# Altium PCB TFT_Adapter_Board_拼版.PcbDoc (part 3 of 9)
Units mm, origin at the board's own origin, x right, y up, seen from the top; angles counter-clockwise.
Board outline 137 x 166.56 mm, 2 copper layers (Top Layer, Bottom Layer); 80 components, 32 nets, 2615 pads, 0 vias.
Unrouted connection lines stored in the file: 1248.
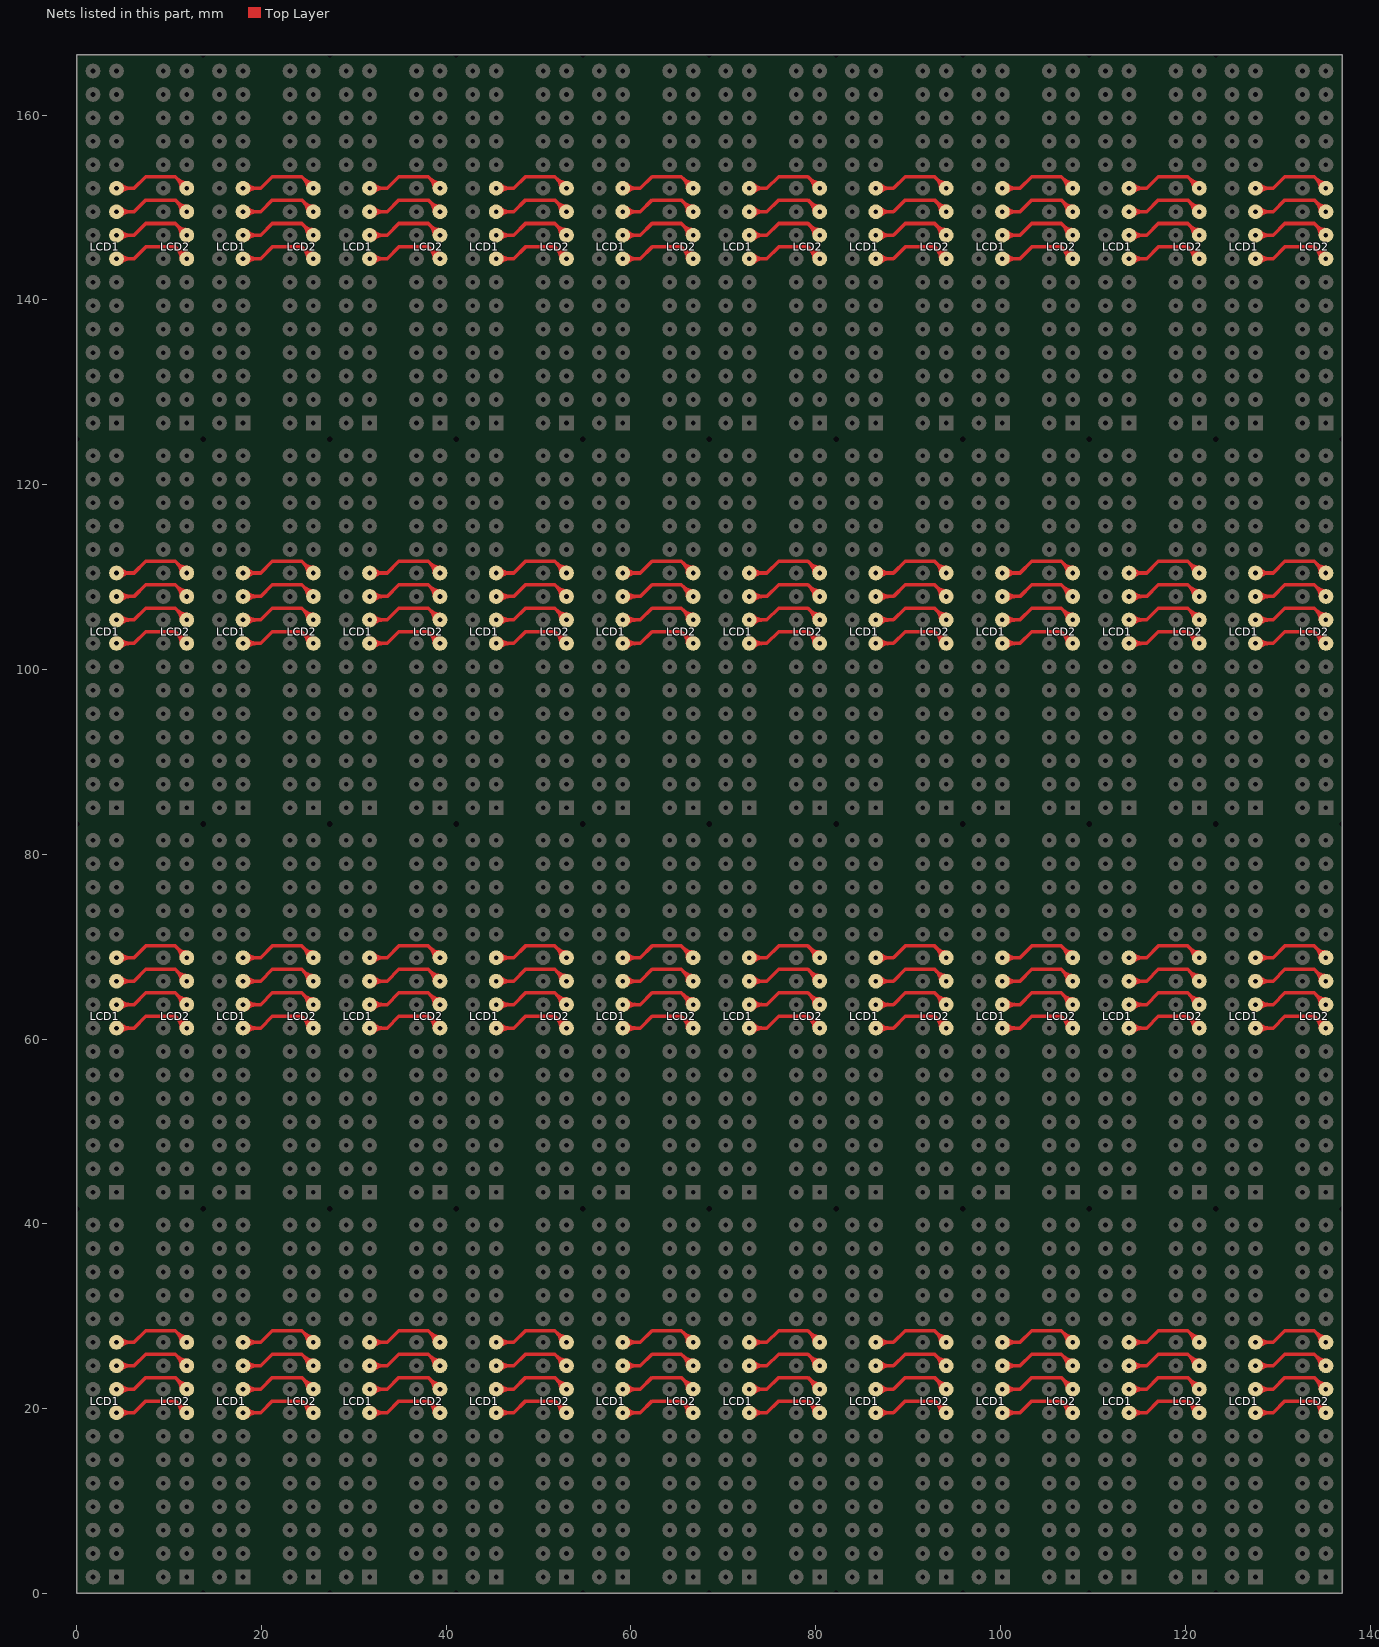
[diagram p3: the nets of this part, all layers, seen from the top]

## Nets (pads, with @x,y where several pads share a name; then routed paths per layer and width w, separated by ;. In a path a pad name is that pad's centre, name@x,y a point inside that pad or via, vN(x,y) a via of type N, cw(c..) or ccw(c..) an arc to the next point about the centre after c; other vN are vias at no path point) (continued)
NetLCD1_8: LCD1.8 LCD2.8 | length 531.8
  Top Layer w0.381: LCD1.8@4.31,19.55 6.215,19.55 7.485,20.82 10.66,20.82 LCD2.8@11.93,19.55 ; LCD1.8@4.31,61.19 6.215,61.19 7.485,62.46 10.66,62.46 LCD2.8@11.93,61.19 ; LCD1.8@4.31,102.83 6.215,102.83 7.485,104.1 10.66,104.1 LCD2.8@11.93,102.83 ; LCD1.8@4.31,144.47 6.215,144.47 7.485,145.74 10.66,145.74 LCD2.8@11.93,144.47 ; LCD1.8@4.741,19.119 cw(c5.781,18.079) 5.781,19.55 cw(c5.781,21.021) LCD1.8@4.741,19.981 ; LCD1.8@4.741,60.759 cw(c5.781,59.719) 5.781,61.19 cw(c5.781,62.661) LCD1.8@4.741,61.621 ; LCD1.8@4.741,102.399 cw(c5.781,101.359) 5.781,102.83 cw(c5.781,104.301) LCD1.8@4.741,103.261 ; LCD1.8@4.741,144.039 cw(c5.781,142.999) 5.781,144.47 cw(c5.781,145.941) LCD1.8@4.741,144.901 ; LCD2.8@11.321,19.55 ccw(c9.849,19.55) 10.89,20.59 ccw(c11.93,21.631) LCD2.8@11.93,20.159 ; LCD2.8@11.321,61.19 ccw(c9.849,61.19) 10.89,62.23 ccw(c11.93,63.271) LCD2.8@11.93,61.799 ; LCD2.8@11.321,102.83 ccw(c9.849,102.83) 10.89,103.87 ccw(c11.93,104.911) LCD2.8@11.93,103.439 ; LCD2.8@11.321,144.47 ccw(c9.849,144.47) 10.89,145.51 ccw(c11.93,146.551) LCD2.8@11.93,145.079 ; LCD1.8@18.01,19.55 19.915,19.55 21.185,20.82 24.36,20.82 LCD2.8@25.63,19.55 ; LCD1.8@18.01,61.19 19.915,61.19 21.185,62.46 24.36,62.46 LCD2.8@25.63,61.19 ; LCD1.8@18.01,102.83 19.915,102.83 21.185,104.1 24.36,104.1 LCD2.8@25.63,102.83 ; LCD1.8@18.01,144.47 19.915,144.47 21.185,145.74 24.36,145.74 LCD2.8@25.63,144.47 ; LCD1.8@18.441,19.119 cw(c19.481,18.079) 19.481,19.55 cw(c19.481,21.021) LCD1.8@18.441,19.981 ; LCD1.8@18.441,60.759 cw(c19.481,59.719) 19.481,61.19 cw(c19.481,62.661) LCD1.8@18.441,61.621 ; LCD1.8@18.441,102.399 cw(c19.481,101.359) 19.481,102.83 cw(c19.481,104.301) LCD1.8@18.441,103.261 ; LCD1.8@18.441,144.039 cw(c19.481,142.999) 19.481,144.47 cw(c19.481,145.941) LCD1.8@18.441,144.901 ; LCD2.8@25.02,19.55 ccw(c23.549,19.55) 24.59,20.59 ccw(c25.63,21.631) LCD2.8@25.63,20.159 ; LCD2.8@25.02,61.19 ccw(c23.549,61.19) 24.59,62.23 ccw(c25.63,63.271) LCD2.8@25.63,61.799 ; LCD2.8@25.02,102.83 ccw(c23.549,102.83) 24.59,103.87 ccw(c25.63,104.911) LCD2.8@25.63,103.439 ; LCD2.8@25.02,144.47 ccw(c23.549,144.47) 24.59,145.51 ccw(c25.63,146.551) LCD2.8@25.63,145.079 ; LCD1.8@31.71,19.55 33.615,19.55 34.885,20.82 38.06,20.82 LCD2.8@39.33,19.55 ; LCD1.8@31.71,61.19 33.615,61.19 34.885,62.46 38.06,62.46 LCD2.8@39.33,61.19 ; LCD1.8@31.71,102.83 33.615,102.83 34.885,104.1 38.06,104.1 LCD2.8@39.33,102.83 ; LCD1.8@31.71,144.47 33.615,144.47 34.885,145.74 38.06,145.74 LCD2.8@39.33,144.47 ; LCD1.8@32.141,19.119 cw(c33.181,18.079) 33.181,19.55 cw(c33.181,21.021) LCD1.8@32.141,19.981 ; LCD1.8@32.141,60.759 cw(c33.181,59.719) 33.181,61.19 cw(c33.181,62.661) LCD1.8@32.141,61.621 ; LCD1.8@32.141,102.399 cw(c33.181,101.359) 33.181,102.83 cw(c33.181,104.301) LCD1.8@32.141,103.261 ; LCD1.8@32.141,144.039 cw(c33.181,142.999) 33.181,144.47 cw(c33.181,145.941) LCD1.8@32.141,144.901 ; LCD2.8@38.72,19.55 ccw(c37.249,19.55) 38.29,20.59 ccw(c39.33,21.631) LCD2.8@39.33,20.159 ; LCD2.8@38.72,61.19 ccw(c37.249,61.19) 38.29,62.23 ccw(c39.33,63.271) LCD2.8@39.33,61.799 ; LCD2.8@38.72,102.83 ccw(c37.249,102.83) 38.29,103.87 ccw(c39.33,104.911) LCD2.8@39.33,103.439 ; LCD2.8@38.72,144.47 ccw(c37.249,144.47) 38.29,145.51 ccw(c39.33,146.551) LCD2.8@39.33,145.079 ; LCD1.8@45.41,19.55 47.315,19.55 48.585,20.82 51.76,20.82 LCD2.8@53.03,19.55 ; LCD1.8@45.41,61.19 47.315,61.19 48.585,62.46 51.76,62.46 LCD2.8@53.03,61.19 ; LCD1.8@45.41,102.83 47.315,102.83 48.585,104.1 51.76,104.1 LCD2.8@53.03,102.83 ; LCD1.8@45.41,144.47 47.315,144.47 48.585,145.74 51.76,145.74 LCD2.8@53.03,144.47 ; LCD1.8@45.841,19.119 cw(c46.881,18.079) 46.881,19.55 cw(c46.881,21.021) LCD1.8@45.841,19.981 ; LCD1.8@45.841,60.759 cw(c46.881,59.719) 46.881,61.19 cw(c46.881,62.661) LCD1.8@45.841,61.621 ; LCD1.8@45.841,102.399 cw(c46.881,101.359) 46.881,102.83 cw(c46.881,104.301) LCD1.8@45.841,103.261 ; LCD1.8@45.841,144.039 cw(c46.881,142.999) 46.881,144.47 cw(c46.881,145.941) LCD1.8@45.841,144.901 ; LCD2.8@52.42,19.55 ccw(c50.949,19.55) 51.99,20.59 ccw(c53.03,21.631) LCD2.8@53.03,20.159 ; LCD2.8@52.42,61.19 ccw(c50.949,61.19) 51.99,62.23 ccw(c53.03,63.271) LCD2.8@53.03,61.799 ; LCD2.8@52.42,102.83 ccw(c50.949,102.83) 51.99,103.87 ccw(c53.03,104.911) LCD2.8@53.03,103.439 ; LCD2.8@52.42,144.47 ccw(c50.949,144.47) 51.99,145.51 ccw(c53.03,146.551) LCD2.8@53.03,145.079 ; LCD1.8@59.11,19.55 61.015,19.55 62.285,20.82 65.46,20.82 LCD2.8@66.73,19.55 ; LCD1.8@59.11,61.19 61.015,61.19 62.285,62.46 65.46,62.46 LCD2.8@66.73,61.19 ; LCD1.8@59.11,102.83 61.015,102.83 62.285,104.1 65.46,104.1 LCD2.8@66.73,102.83 ; LCD1.8@59.11,144.47 61.015,144.47 62.285,145.74 65.46,145.74 LCD2.8@66.73,144.47 ; LCD1.8@59.541,19.119 cw(c60.581,18.079) 60.581,19.55 cw(c60.581,21.021) LCD1.8@59.541,19.981 ; LCD1.8@59.541,60.759 cw(c60.581,59.719) 60.581,61.19 cw(c60.581,62.661) LCD1.8@59.541,61.621 ; LCD1.8@59.541,102.399 cw(c60.581,101.359) 60.581,102.83 cw(c60.581,104.301) LCD1.8@59.541,103.261 ; LCD1.8@59.541,144.039 cw(c60.581,142.999) 60.581,144.47 cw(c60.581,145.941) LCD1.8@59.541,144.901 ; LCD2.8@66.12,19.55 ccw(c64.649,19.55) 65.69,20.59 ccw(c66.73,21.631) LCD2.8@66.73,20.159 ; LCD2.8@66.12,61.19 ccw(c64.649,61.19) 65.69,62.23 ccw(c66.73,63.271) LCD2.8@66.73,61.799 ; LCD2.8@66.12,102.83 ccw(c64.649,102.83) 65.69,103.87 ccw(c66.73,104.911) LCD2.8@66.73,103.439 ; LCD2.8@66.12,144.47 ccw(c64.649,144.47) 65.69,145.51 ccw(c66.73,146.551) LCD2.8@66.73,145.079 ; LCD1.8@72.81,19.55 74.715,19.55 75.985,20.82 79.16,20.82 LCD2.8@80.43,19.55 ; LCD1.8@72.81,61.19 74.715,61.19 75.985,62.46 79.16,62.46 LCD2.8@80.43,61.19 ; LCD1.8@72.81,102.83 74.715,102.83 75.985,104.1 79.16,104.1 LCD2.8@80.43,102.83 ; LCD1.8@72.81,144.47 74.715,144.47 75.985,145.74 79.16,145.74 LCD2.8@80.43,144.47 ; LCD1.8@73.241,19.119 cw(c74.281,18.079) 74.281,19.55 cw(c74.281,21.021) LCD1.8@73.241,19.981 ; LCD1.8@73.241,60.759 cw(c74.281,59.719) 74.281,61.19 cw(c74.281,62.661) LCD1.8@73.241,61.621 ; LCD1.8@73.241,102.399 cw(c74.281,101.359) 74.281,102.83 cw(c74.281,104.301) LCD1.8@73.241,103.261 ; LCD1.8@73.241,144.039 cw(c74.281,142.999) 74.281,144.47 cw(c74.281,145.941) LCD1.8@73.241,144.901 ; LCD2.8@79.82,19.55 ccw(c78.349,19.55) 79.39,20.59 ccw(c80.43,21.631) LCD2.8@80.43,20.159 ; LCD2.8@79.82,61.19 ccw(c78.349,61.19) 79.39,62.23 ccw(c80.43,63.271) LCD2.8@80.43,61.799 ; LCD2.8@79.82,102.83 ccw(c78.349,102.83) 79.39,103.87 ccw(c80.43,104.911) LCD2.8@80.43,103.439 ; LCD2.8@79.82,144.47 ccw(c78.349,144.47) 79.39,145.51 ccw(c80.43,146.551) LCD2.8@80.43,145.079 ; LCD1.8@86.51,19.55 88.415,19.55 89.685,20.82 92.86,20.82 LCD2.8@94.13,19.55 ; LCD1.8@86.51,61.19 88.415,61.19 89.685,62.46 92.86,62.46 LCD2.8@94.13,61.19 ; LCD1.8@86.51,102.83 88.415,102.83 89.685,104.1 92.86,104.1 LCD2.8@94.13,102.83 ; LCD1.8@86.51,144.47 88.415,144.47 89.685,145.74 92.86,145.74 LCD2.8@94.13,144.47 ; LCD1.8@86.941,19.119 cw(c87.981,18.079) 87.981,19.55 cw(c87.981,21.021) LCD1.8@86.941,19.981 ; LCD1.8@86.941,60.759 cw(c87.981,59.719) 87.981,61.19 cw(c87.981,62.661) LCD1.8@86.941,61.621 ; LCD1.8@86.941,102.399 cw(c87.981,101.359) 87.981,102.83 cw(c87.981,104.301) LCD1.8@86.941,103.261 ; LCD1.8@86.941,144.039 cw(c87.981,142.999) 87.981,144.47 cw(c87.981,145.941) LCD1.8@86.941,144.901 ; LCD2.8@93.52,19.55 ccw(c92.049,19.55) 93.09,20.59 ccw(c94.13,21.631) LCD2.8@94.13,20.159 ; LCD2.8@93.52,61.19 ccw(c92.049,61.19) 93.09,62.23 ccw(c94.13,63.271) LCD2.8@94.13,61.799 ; LCD2.8@93.52,102.83 ccw(c92.049,102.83) 93.09,103.87 ccw(c94.13,104.911) LCD2.8@94.13,103.439 ; LCD2.8@93.52,144.47 ccw(c92.049,144.47) 93.09,145.51 ccw(c94.13,146.551) LCD2.8@94.13,145.079 ; LCD1.8@100.21,19.55 102.115,19.55 103.385,20.82 106.56,20.82 LCD2.8@107.83,19.55 ; LCD1.8@100.21,61.19 102.115,61.19 103.385,62.46 106.56,62.46 LCD2.8@107.83,61.19 ; LCD1.8@100.21,102.83 102.115,102.83 103.385,104.1 106.56,104.1 LCD2.8@107.83,102.83 ; LCD1.8@100.21,144.47 102.115,144.47 103.385,145.74 106.56,145.74 LCD2.8@107.83,144.47 ; LCD1.8@100.641,19.119 cw(c101.681,18.079) 101.681,19.55 cw(c101.681,21.021) LCD1.8@100.641,19.981 ; LCD1.8@100.641,60.759 cw(c101.681,59.719) 101.681,61.19 cw(c101.681,62.661) LCD1.8@100.641,61.621 ; LCD1.8@100.641,102.399 cw(c101.681,101.359) 101.681,102.83 cw(c101.681,104.301) LCD1.8@100.641,103.261 ; LCD1.8@100.641,144.039 cw(c101.681,142.999) 101.681,144.47 cw(c101.681,145.941) LCD1.8@100.641,144.901 ; LCD2.8@107.22,19.55 ccw(c105.749,19.55) 106.79,20.59 ccw(c107.83,21.631) LCD2.8@107.83,20.159 ; LCD2.8@107.22,61.19 ccw(c105.749,61.19) 106.79,62.23 ccw(c107.83,63.271) LCD2.8@107.83,61.799 ; LCD2.8@107.22,102.83 ccw(c105.749,102.83) 106.79,103.87 ccw(c107.83,104.911) LCD2.8@107.83,103.439 ; LCD2.8@107.22,144.47 ccw(c105.749,144.47) 106.79,145.51 ccw(c107.83,146.551) LCD2.8@107.83,145.079 ; LCD1.8@113.91,19.55 115.815,19.55 117.085,20.82 120.26,20.82 LCD2.8@121.53,19.55 ; LCD1.8@113.91,61.19 115.815,61.19 117.085,62.46 120.26,62.46 LCD2.8@121.53,61.19 ; LCD1.8@113.91,102.83 115.815,102.83 117.085,104.1 120.26,104.1 LCD2.8@121.53,102.83 ; LCD1.8@113.91,144.47 115.815,144.47 117.085,145.74 120.26,145.74 LCD2.8@121.53,144.47 ; LCD1.8@114.341,19.119 cw(c115.381,18.079) 115.381,19.55 cw(c115.381,21.021) LCD1.8@114.341,19.981 ; LCD1.8@114.341,60.759 cw(c115.381,59.719) 115.381,61.19 cw(c115.381,62.661) LCD1.8@114.341,61.621 ; LCD1.8@114.341,102.399 cw(c115.381,101.359) 115.381,102.83 cw(c115.381,104.301) LCD1.8@114.341,103.261 ; LCD1.8@114.341,144.039 cw(c115.381,142.999) 115.381,144.47 cw(c115.381,145.941) LCD1.8@114.341,144.901 ; LCD2.8@120.92,19.55 ccw(c119.449,19.55) 120.49,20.59 ccw(c121.53,21.631) LCD2.8@121.53,20.159 ; LCD2.8@120.92,61.19 ccw(c119.449,61.19) 120.49,62.23 ccw(c121.53,63.271) LCD2.8@121.53,61.799 ; LCD2.8@120.92,102.83 ccw(c119.449,102.83) 120.49,103.87 ccw(c121.53,104.911) LCD2.8@121.53,103.439 ; LCD2.8@120.92,144.47 ccw(c119.449,144.47) 120.49,145.51 ccw(c121.53,146.551) LCD2.8@121.53,145.079 ; LCD1.8@127.61,19.55 129.515,19.55 130.785,20.82 133.96,20.82 LCD2.8@135.23,19.55 ; LCD1.8@127.61,61.19 129.515,61.19 130.785,62.46 133.96,62.46 LCD2.8@135.23,61.19 ; LCD1.8@127.61,102.83 129.515,102.83 130.785,104.1 133.96,104.1 LCD2.8@135.23,102.83 ; LCD1.8@127.61,144.47 129.515,144.47 130.785,145.74 133.96,145.74 LCD2.8@135.23,144.47 ; LCD1.8@128.041,19.119 cw(c129.081,18.079) 129.081,19.55 cw(c129.081,21.021) LCD1.8@128.041,19.981 ; LCD1.8@128.041,60.759 cw(c129.081,59.719) 129.081,61.19 cw(c129.081,62.661) LCD1.8@128.041,61.621 ; LCD1.8@128.041,102.399 cw(c129.081,101.359) 129.081,102.83 cw(c129.081,104.301) LCD1.8@128.041,103.261 ; LCD1.8@128.041,144.039 cw(c129.081,142.999) 129.081,144.47 cw(c129.081,145.941) LCD1.8@128.041,144.901 ; LCD2.8@134.62,19.55 ccw(c133.149,19.55) 134.19,20.59 ccw(c135.23,21.631) LCD2.8@135.23,20.159 ; LCD2.8@134.62,61.19 ccw(c133.149,61.19) 134.19,62.23 ccw(c135.23,63.271) LCD2.8@135.23,61.799 ; LCD2.8@134.62,102.83 ccw(c133.149,102.83) 134.19,103.87 ccw(c135.23,104.911) LCD2.8@135.23,103.439 ; LCD2.8@134.62,144.47 ccw(c133.149,144.47) 134.19,145.51 ccw(c135.23,146.551) LCD2.8@135.23,145.079
NetLCD1_9: LCD1.9 LCD2.9 | length 531.8
  Top Layer w0.381: LCD1.9@4.31,22.09 6.215,22.09 7.485,23.36 10.66,23.36 LCD2.9@11.93,22.09 ; LCD1.9@4.31,63.73 6.215,63.73 7.485,65 10.66,65 LCD2.9@11.93,63.73 ; LCD1.9@4.31,105.37 6.215,105.37 7.485,106.64 10.66,106.64 LCD2.9@11.93,105.37 ; LCD1.9@4.31,147.01 6.215,147.01 7.485,148.28 10.66,148.28 LCD2.9@11.93,147.01 ; LCD1.9@4.741,21.659 cw(c5.781,20.619) 5.781,22.09 cw(c5.781,23.561) LCD1.9@4.741,22.521 ; LCD1.9@4.741,63.299 cw(c5.781,62.259) 5.781,63.73 cw(c5.781,65.201) LCD1.9@4.741,64.161 ; LCD1.9@4.741,104.939 cw(c5.781,103.899) 5.781,105.37 cw(c5.781,106.841) LCD1.9@4.741,105.801 ; LCD1.9@4.741,146.579 cw(c5.781,145.539) 5.781,147.01 cw(c5.781,148.481) LCD1.9@4.741,147.441 ; LCD2.9@11.321,22.09 ccw(c9.849,22.09) 10.89,23.13 ccw(c11.93,24.171) LCD2.9@11.93,22.699 ; LCD2.9@11.321,63.73 ccw(c9.849,63.73) 10.89,64.77 ccw(c11.93,65.811) LCD2.9@11.93,64.339 ; LCD2.9@11.321,105.37 ccw(c9.849,105.37) 10.89,106.41 ccw(c11.93,107.451) LCD2.9@11.93,105.979 ; LCD2.9@11.321,147.01 ccw(c9.849,147.01) 10.89,148.05 ccw(c11.93,149.091) LCD2.9@11.93,147.619 ; LCD1.9@18.01,22.09 19.915,22.09 21.185,23.36 24.36,23.36 LCD2.9@25.63,22.09 ; LCD1.9@18.01,63.73 19.915,63.73 21.185,65 24.36,65 LCD2.9@25.63,63.73 ; LCD1.9@18.01,105.37 19.915,105.37 21.185,106.64 24.36,106.64 LCD2.9@25.63,105.37 ; LCD1.9@18.01,147.01 19.915,147.01 21.185,148.28 24.36,148.28 LCD2.9@25.63,147.01 ; LCD1.9@18.441,21.659 cw(c19.481,20.619) 19.481,22.09 cw(c19.481,23.561) LCD1.9@18.441,22.521 ; LCD1.9@18.441,63.299 cw(c19.481,62.259) 19.481,63.73 cw(c19.481,65.201) LCD1.9@18.441,64.161 ; LCD1.9@18.441,104.939 cw(c19.481,103.899) 19.481,105.37 cw(c19.481,106.841) LCD1.9@18.441,105.801 ; LCD1.9@18.441,146.579 cw(c19.481,145.539) 19.481,147.01 cw(c19.481,148.481) LCD1.9@18.441,147.441 ; LCD2.9@25.02,22.09 ccw(c23.549,22.09) 24.59,23.13 ccw(c25.63,24.171) LCD2.9@25.63,22.699 ; LCD2.9@25.02,63.73 ccw(c23.549,63.73) 24.59,64.77 ccw(c25.63,65.811) LCD2.9@25.63,64.339 ; LCD2.9@25.02,105.37 ccw(c23.549,105.37) 24.59,106.41 ccw(c25.63,107.451) LCD2.9@25.63,105.979 ; LCD2.9@25.02,147.01 ccw(c23.549,147.01) 24.59,148.05 ccw(c25.63,149.091) LCD2.9@25.63,147.619 ; LCD1.9@31.71,22.09 33.615,22.09 34.885,23.36 38.06,23.36 LCD2.9@39.33,22.09 ; LCD1.9@31.71,63.73 33.615,63.73 34.885,65 38.06,65 LCD2.9@39.33,63.73 ; LCD1.9@31.71,105.37 33.615,105.37 34.885,106.64 38.06,106.64 LCD2.9@39.33,105.37 ; LCD1.9@31.71,147.01 33.615,147.01 34.885,148.28 38.06,148.28 LCD2.9@39.33,147.01 ; LCD1.9@32.141,21.659 cw(c33.181,20.619) 33.181,22.09 cw(c33.181,23.561) LCD1.9@32.141,22.521 ; LCD1.9@32.141,63.299 cw(c33.181,62.259) 33.181,63.73 cw(c33.181,65.201) LCD1.9@32.141,64.161 ; LCD1.9@32.141,104.939 cw(c33.181,103.899) 33.181,105.37 cw(c33.181,106.841) LCD1.9@32.141,105.801 ; LCD1.9@32.141,146.579 cw(c33.181,145.539) 33.181,147.01 cw(c33.181,148.481) LCD1.9@32.141,147.441 ; LCD2.9@38.72,22.09 ccw(c37.249,22.09) 38.29,23.13 ccw(c39.33,24.171) LCD2.9@39.33,22.699 ; LCD2.9@38.72,63.73 ccw(c37.249,63.73) 38.29,64.77 ccw(c39.33,65.811) LCD2.9@39.33,64.339 ; LCD2.9@38.72,105.37 ccw(c37.249,105.37) 38.29,106.41 ccw(c39.33,107.451) LCD2.9@39.33,105.979 ; LCD2.9@38.72,147.01 ccw(c37.249,147.01) 38.29,148.05 ccw(c39.33,149.091) LCD2.9@39.33,147.619 ; LCD1.9@45.41,22.09 47.315,22.09 48.585,23.36 51.76,23.36 LCD2.9@53.03,22.09 ; LCD1.9@45.41,63.73 47.315,63.73 48.585,65 51.76,65 LCD2.9@53.03,63.73 ; LCD1.9@45.41,105.37 47.315,105.37 48.585,106.64 51.76,106.64 LCD2.9@53.03,105.37 ; LCD1.9@45.41,147.01 47.315,147.01 48.585,148.28 51.76,148.28 LCD2.9@53.03,147.01 ; LCD1.9@45.841,21.659 cw(c46.881,20.619) 46.881,22.09 cw(c46.881,23.561) LCD1.9@45.841,22.521 ; LCD1.9@45.841,63.299 cw(c46.881,62.259) 46.881,63.73 cw(c46.881,65.201) LCD1.9@45.841,64.161 ; LCD1.9@45.841,104.939 cw(c46.881,103.899) 46.881,105.37 cw(c46.881,106.841) LCD1.9@45.841,105.801 ; LCD1.9@45.841,146.579 cw(c46.881,145.539) 46.881,147.01 cw(c46.881,148.481) LCD1.9@45.841,147.441 ; LCD2.9@52.42,22.09 ccw(c50.949,22.09) 51.99,23.13 ccw(c53.03,24.171) LCD2.9@53.03,22.699 ; LCD2.9@52.42,63.73 ccw(c50.949,63.73) 51.99,64.77 ccw(c53.03,65.811) LCD2.9@53.03,64.339 ; LCD2.9@52.42,105.37 ccw(c50.949,105.37) 51.99,106.41 ccw(c53.03,107.451) LCD2.9@53.03,105.979 ; LCD2.9@52.42,147.01 ccw(c50.949,147.01) 51.99,148.05 ccw(c53.03,149.091) LCD2.9@53.03,147.619 ; LCD1.9@59.11,22.09 61.015,22.09 62.285,23.36 65.46,23.36 LCD2.9@66.73,22.09 ; LCD1.9@59.11,63.73 61.015,63.73 62.285,65 65.46,65 LCD2.9@66.73,63.73 ; LCD1.9@59.11,105.37 61.015,105.37 62.285,106.64 65.46,106.64 LCD2.9@66.73,105.37 ; LCD1.9@59.11,147.01 61.015,147.01 62.285,148.28 65.46,148.28 LCD2.9@66.73,147.01 ; LCD1.9@59.541,21.659 cw(c60.581,20.619) 60.581,22.09 cw(c60.581,23.561) LCD1.9@59.541,22.521 ; LCD1.9@59.541,63.299 cw(c60.581,62.259) 60.581,63.73 cw(c60.581,65.201) LCD1.9@59.541,64.161 ; LCD1.9@59.541,104.939 cw(c60.581,103.899) 60.581,105.37 cw(c60.581,106.841) LCD1.9@59.541,105.801 ; LCD1.9@59.541,146.579 cw(c60.581,145.539) 60.581,147.01 cw(c60.581,148.481) LCD1.9@59.541,147.441 ; LCD2.9@66.12,22.09 ccw(c64.649,22.09) 65.69,23.13 ccw(c66.73,24.171) LCD2.9@66.73,22.699 ; LCD2.9@66.12,63.73 ccw(c64.649,63.73) 65.69,64.77 ccw(c66.73,65.811) LCD2.9@66.73,64.339 ; LCD2.9@66.12,105.37 ccw(c64.649,105.37) 65.69,106.41 ccw(c66.73,107.451) LCD2.9@66.73,105.979 ; LCD2.9@66.12,147.01 ccw(c64.649,147.01) 65.69,148.05 ccw(c66.73,149.091) LCD2.9@66.73,147.619 ; LCD1.9@72.81,22.09 74.715,22.09 75.985,23.36 79.16,23.36 LCD2.9@80.43,22.09 ; LCD1.9@72.81,63.73 74.715,63.73 75.985,65 79.16,65 LCD2.9@80.43,63.73 ; LCD1.9@72.81,105.37 74.715,105.37 75.985,106.64 79.16,106.64 LCD2.9@80.43,105.37 ; LCD1.9@72.81,147.01 74.715,147.01 75.985,148.28 79.16,148.28 LCD2.9@80.43,147.01 ; LCD1.9@73.241,21.659 cw(c74.281,20.619) 74.281,22.09 cw(c74.281,23.561) LCD1.9@73.241,22.521 ; LCD1.9@73.241,63.299 cw(c74.281,62.259) 74.281,63.73 cw(c74.281,65.201) LCD1.9@73.241,64.161 ; LCD1.9@73.241,104.939 cw(c74.281,103.899) 74.281,105.37 cw(c74.281,106.841) LCD1.9@73.241,105.801 ; LCD1.9@73.241,146.579 cw(c74.281,145.539) 74.281,147.01 cw(c74.281,148.481) LCD1.9@73.241,147.441 ; LCD2.9@79.82,22.09 ccw(c78.349,22.09) 79.39,23.13 ccw(c80.43,24.171) LCD2.9@80.43,22.699 ; LCD2.9@79.82,63.73 ccw(c78.349,63.73) 79.39,64.77 ccw(c80.43,65.811) LCD2.9@80.43,64.339 ; LCD2.9@79.82,105.37 ccw(c78.349,105.37) 79.39,106.41 ccw(c80.43,107.451) LCD2.9@80.43,105.979 ; LCD2.9@79.82,147.01 ccw(c78.349,147.01) 79.39,148.05 ccw(c80.43,149.091) LCD2.9@80.43,147.619 ; LCD1.9@86.51,22.09 88.415,22.09 89.685,23.36 92.86,23.36 LCD2.9@94.13,22.09 ; LCD1.9@86.51,63.73 88.415,63.73 89.685,65 92.86,65 LCD2.9@94.13,63.73 ; LCD1.9@86.51,105.37 88.415,105.37 89.685,106.64 92.86,106.64 LCD2.9@94.13,105.37 ; LCD1.9@86.51,147.01 88.415,147.01 89.685,148.28 92.86,148.28 LCD2.9@94.13,147.01 ; LCD1.9@86.941,21.659 cw(c87.981,20.619) 87.981,22.09 cw(c87.981,23.561) LCD1.9@86.941,22.521 ; LCD1.9@86.941,63.299 cw(c87.981,62.259) 87.981,63.73 cw(c87.981,65.201) LCD1.9@86.941,64.161 ; LCD1.9@86.941,104.939 cw(c87.981,103.899) 87.981,105.37 cw(c87.981,106.841) LCD1.9@86.941,105.801 ; LCD1.9@86.941,146.579 cw(c87.981,145.539) 87.981,147.01 cw(c87.981,148.481) LCD1.9@86.941,147.441 ; LCD2.9@93.52,22.09 ccw(c92.049,22.09) 93.09,23.13 ccw(c94.13,24.171) LCD2.9@94.13,22.699 ; LCD2.9@93.52,63.73 ccw(c92.049,63.73) 93.09,64.77 ccw(c94.13,65.811) LCD2.9@94.13,64.339 ; LCD2.9@93.52,105.37 ccw(c92.049,105.37) 93.09,106.41 ccw(c94.13,107.451) LCD2.9@94.13,105.979 ; LCD2.9@93.52,147.01 ccw(c92.049,147.01) 93.09,148.05 ccw(c94.13,149.091) LCD2.9@94.13,147.619 ; LCD1.9@100.21,22.09 102.115,22.09 103.385,23.36 106.56,23.36 LCD2.9@107.83,22.09 ; LCD1.9@100.21,63.73 102.115,63.73 103.385,65 106.56,65 LCD2.9@107.83,63.73 ; LCD1.9@100.21,105.37 102.115,105.37 103.385,106.64 106.56,106.64 LCD2.9@107.83,105.37 ; LCD1.9@100.21,147.01 102.115,147.01 103.385,148.28 106.56,148.28 LCD2.9@107.83,147.01 ; LCD1.9@100.641,21.659 cw(c101.681,20.619) 101.681,22.09 cw(c101.681,23.561) LCD1.9@100.641,22.521 ; LCD1.9@100.641,63.299 cw(c101.681,62.259) 101.681,63.73 cw(c101.681,65.201) LCD1.9@100.641,64.161 ; LCD1.9@100.641,104.939 cw(c101.681,103.899) 101.681,105.37 cw(c101.681,106.841) LCD1.9@100.641,105.801 ; LCD1.9@100.641,146.579 cw(c101.681,145.539) 101.681,147.01 cw(c101.681,148.481) LCD1.9@100.641,147.441 ; LCD2.9@107.22,22.09 ccw(c105.749,22.09) 106.79,23.13 ccw(c107.83,24.171) LCD2.9@107.83,22.699 ; LCD2.9@107.22,63.73 ccw(c105.749,63.73) 106.79,64.77 ccw(c107.83,65.811) LCD2.9@107.83,64.339 ; LCD2.9@107.22,105.37 ccw(c105.749,105.37) 106.79,106.41 ccw(c107.83,107.451) LCD2.9@107.83,105.979 ; LCD2.9@107.22,147.01 ccw(c105.749,147.01) 106.79,148.05 ccw(c107.83,149.091) LCD2.9@107.83,147.619 ; LCD1.9@113.91,22.09 115.815,22.09 117.085,23.36 120.26,23.36 LCD2.9@121.53,22.09 ; LCD1.9@113.91,63.73 115.815,63.73 117.085,65 120.26,65 LCD2.9@121.53,63.73 ; LCD1.9@113.91,105.37 115.815,105.37 117.085,106.64 120.26,106.64 LCD2.9@121.53,105.37 ; LCD1.9@113.91,147.01 115.815,147.01 117.085,148.28 120.26,148.28 LCD2.9@121.53,147.01 ; LCD1.9@114.341,21.659 cw(c115.381,20.619) 115.381,22.09 cw(c115.381,23.561) LCD1.9@114.341,22.521 ; LCD1.9@114.341,63.299 cw(c115.381,62.259) 115.381,63.73 cw(c115.381,65.201) LCD1.9@114.341,64.161 ; LCD1.9@114.341,104.939 cw(c115.381,103.899) 115.381,105.37 cw(c115.381,106.841) LCD1.9@114.341,105.801 ; LCD1.9@114.341,146.579 cw(c115.381,145.539) 115.381,147.01 cw(c115.381,148.481) LCD1.9@114.341,147.441 ; LCD2.9@120.92,22.09 ccw(c119.449,22.09) 120.49,23.13 ccw(c121.53,24.171) LCD2.9@121.53,22.699 ; LCD2.9@120.92,63.73 ccw(c119.449,63.73) 120.49,64.77 ccw(c121.53,65.811) LCD2.9@121.53,64.339 ; LCD2.9@120.92,105.37 ccw(c119.449,105.37) 120.49,106.41 ccw(c121.53,107.451) LCD2.9@121.53,105.979 ; LCD2.9@120.92,147.01 ccw(c119.449,147.01) 120.49,148.05 ccw(c121.53,149.091) LCD2.9@121.53,147.619 ; LCD1.9@127.61,22.09 129.515,22.09 130.785,23.36 133.96,23.36 LCD2.9@135.23,22.09 ; LCD1.9@127.61,63.73 129.515,63.73 130.785,65 133.96,65 LCD2.9@135.23,63.73 ; LCD1.9@127.61,105.37 129.515,105.37 130.785,106.64 133.96,106.64 LCD2.9@135.23,105.37 ; LCD1.9@127.61,147.01 129.515,147.01 130.785,148.28 133.96,148.28 LCD2.9@135.23,147.01 ; LCD1.9@128.041,21.659 cw(c129.081,20.619) 129.081,22.09 cw(c129.081,23.561) LCD1.9@128.041,22.521 ; LCD1.9@128.041,63.299 cw(c129.081,62.259) 129.081,63.73 cw(c129.081,65.201) LCD1.9@128.041,64.161 ; LCD1.9@128.041,104.939 cw(c129.081,103.899) 129.081,105.37 cw(c129.081,106.841) LCD1.9@128.041,105.801 ; LCD1.9@128.041,146.579 cw(c129.081,145.539) 129.081,147.01 cw(c129.081,148.481) LCD1.9@128.041,147.441 ; LCD2.9@134.62,22.09 ccw(c133.149,22.09) 134.19,23.13 ccw(c135.23,24.171) LCD2.9@135.23,22.699 ; LCD2.9@134.62,63.73 ccw(c133.149,63.73) 134.19,64.77 ccw(c135.23,65.811) LCD2.9@135.23,64.339 ; LCD2.9@134.62,105.37 ccw(c133.149,105.37) 134.19,106.41 ccw(c135.23,107.451) LCD2.9@135.23,105.979 ; LCD2.9@134.62,147.01 ccw(c133.149,147.01) 134.19,148.05 ccw(c135.23,149.091) LCD2.9@135.23,147.619
NetLCD1_10: LCD1.10 LCD2.10 | length 531.8
  Top Layer w0.381: LCD1.10@4.31,24.63 6.215,24.63 7.485,25.9 10.66,25.9 LCD2.10@11.93,24.63 ; LCD1.10@4.31,66.27 6.215,66.27 7.485,67.54 10.66,67.54 LCD2.10@11.93,66.27 ; LCD1.10@4.31,107.91 6.215,107.91 7.485,109.18 10.66,109.18 LCD2.10@11.93,107.91 ; LCD1.10@4.31,149.55 6.215,149.55 7.485,150.82 10.66,150.82 LCD2.10@11.93,149.55 ; LCD1.10@4.741,24.199 cw(c5.781,23.159) 5.781,24.63 cw(c5.781,26.101) LCD1.10@4.741,25.061 ; LCD1.10@4.741,65.839 cw(c5.781,64.799) 5.781,66.27 cw(c5.781,67.741) LCD1.10@4.741,66.701 ; LCD1.10@4.741,107.479 cw(c5.781,106.439) 5.781,107.91 cw(c5.781,109.381) LCD1.10@4.741,108.341 ; LCD1.10@4.741,149.119 cw(c5.781,148.079) 5.781,149.55 cw(c5.781,151.021) LCD1.10@4.741,149.981 ; LCD2.10@11.321,24.63 ccw(c9.849,24.63) 10.89,25.67 ccw(c11.93,26.711) LCD2.10@11.93,25.239 ; LCD2.10@11.321,66.27 ccw(c9.849,66.27) 10.89,67.31 ccw(c11.93,68.351) LCD2.10@11.93,66.879 ; LCD2.10@11.321,107.91 ccw(c9.849,107.91) 10.89,108.95 ccw(c11.93,109.991) LCD2.10@11.93,108.519 ; LCD2.10@11.321,149.55 ccw(c9.849,149.55) 10.89,150.59 ccw(c11.93,151.631) LCD2.10@11.93,150.159 ; LCD1.10@18.01,24.63 19.915,24.63 21.185,25.9 24.36,25.9 LCD2.10@25.63,24.63 ; LCD1.10@18.01,66.27 19.915,66.27 21.185,67.54 24.36,67.54 LCD2.10@25.63,66.27 ; LCD1.10@18.01,107.91 19.915,107.91 21.185,109.18 24.36,109.18 LCD2.10@25.63,107.91 ; LCD1.10@18.01,149.55 19.915,149.55 21.185,150.82 24.36,150.82 LCD2.10@25.63,149.55 ; LCD1.10@18.441,24.199 cw(c19.481,23.159) 19.481,24.63 cw(c19.481,26.101) LCD1.10@18.441,25.061 ; LCD1.10@18.441,65.839 cw(c19.481,64.799) 19.481,66.27 cw(c19.481,67.741) LCD1.10@18.441,66.701 ; LCD1.10@18.441,107.479 cw(c19.481,106.439) 19.481,107.91 cw(c19.481,109.381) LCD1.10@18.441,108.341 ; LCD1.10@18.441,149.119 cw(c19.481,148.079) 19.481,149.55 cw(c19.481,151.021) LCD1.10@18.441,149.981 ; LCD2.10@25.02,24.63 ccw(c23.549,24.63) 24.59,25.67 ccw(c25.63,26.711) LCD2.10@25.63,25.239 ; LCD2.10@25.02,66.27 ccw(c23.549,66.27) 24.59,67.31 ccw(c25.63,68.351) LCD2.10@25.63,66.879 ; LCD2.10@25.02,107.91 ccw(c23.549,107.91) 24.59,108.95 ccw(c25.63,109.991) LCD2.10@25.63,108.519 ; LCD2.10@25.02,149.55 ccw(c23.549,149.55) 24.59,150.59 ccw(c25.63,151.631) LCD2.10@25.63,150.159 ; LCD1.10@31.71,24.63 33.615,24.63 34.885,25.9 38.06,25.9 LCD2.10@39.33,24.63 ; LCD1.10@31.71,66.27 33.615,66.27 34.885,67.54 38.06,67.54 LCD2.10@39.33,66.27 ; LCD1.10@31.71,107.91 33.615,107.91 34.885,109.18 38.06,109.18 LCD2.10@39.33,107.91 ; LCD1.10@31.71,149.55 33.615,149.55 34.885,150.82 38.06,150.82 LCD2.10@39.33,149.55 ; LCD1.10@32.141,24.199 cw(c33.181,23.159) 33.181,24.63 cw(c33.181,26.101) LCD1.10@32.141,25.061 ; LCD1.10@32.141,65.839 cw(c33.181,64.799) 33.181,66.27 cw(c33.181,67.741) LCD1.10@32.141,66.701 ; LCD1.10@32.141,107.479 cw(c33.181,106.439) 33.181,107.91 cw(c33.181,109.381) LCD1.10@32.141,108.341 ; LCD1.10@32.141,149.119 cw(c33.181,148.079) 33.181,149.55 cw(c33.181,151.021) LCD1.10@32.141,149.981 ; LCD2.10@38.72,24.63 ccw(c37.249,24.63) 38.29,25.67 ccw(c39.33,26.711) LCD2.10@39.33,25.239 ; LCD2.10@38.72,66.27 ccw(c37.249,66.27) 38.29,67.31 ccw(c39.33,68.351) LCD2.10@39.33,66.879 ; LCD2.10@38.72,107.91 ccw(c37.249,107.91) 38.29,108.95 ccw(c39.33,109.991) LCD2.10@39.33,108.519 ; LCD2.10@38.72,149.55 ccw(c37.249,149.55) 38.29,150.59 ccw(c39.33,151.631) LCD2.10@39.33,150.159 ; LCD1.10@45.41,24.63 47.315,24.63 48.585,25.9 51.76,25.9 LCD2.10@53.03,24.63 ; LCD1.10@45.41,66.27 47.315,66.27 48.585,67.54 51.76,67.54 LCD2.10@53.03,66.27 ; LCD1.10@45.41,107.91 47.315,107.91 48.585,109.18 51.76,109.18 LCD2.10@53.03,107.91 ; LCD1.10@45.41,149.55 47.315,149.55 48.585,150.82 51.76,150.82 LCD2.10@53.03,149.55 ; LCD1.10@45.841,24.199 cw(c46.881,23.159) 46.881,24.63 cw(c46.881,26.101) LCD1.10@45.841,25.061 ; LCD1.10@45.841,65.839 cw(c46.881,64.799) 46.881,66.27 cw(c46.881,67.741) LCD1.10@45.841,66.701 ; LCD1.10@45.841,107.479 cw(c46.881,106.439) 46.881,107.91 cw(c46.881,109.381) LCD1.10@45.841,108.341 ; LCD1.10@45.841,149.119 cw(c46.881,148.079) 46.881,149.55 cw(c46.881,151.021) LCD1.10@45.841,149.981 ; LCD2.10@52.42,24.63 ccw(c50.949,24.63) 51.99,25.67 ccw(c53.03,26.711) LCD2.10@53.03,25.239 ; LCD2.10@52.42,66.27 ccw(c50.949,66.27) 51.99,67.31 ccw(c53.03,68.351) LCD2.10@53.03,66.879 ; LCD2.10@52.42,107.91 ccw(c50.949,107.91) 51.99,108.95 ccw(c53.03,109.991) LCD2.10@53.03,108.519 ; LCD2.10@52.42,149.55 ccw(c50.949,149.55) 51.99,150.59 ccw(c53.03,151.631) LCD2.10@53.03,150.159 ; LCD1.10@59.11,24.63 61.015,24.63 62.285,25.9 65.46,25.9 LCD2.10@66.73,24.63 ; LCD1.10@59.11,66.27 61.015,66.27 62.285,67.54 65.46,67.54 LCD2.10@66.73,66.27 ; LCD1.10@59.11,107.91 61.015,107.91 62.285,109.18 65.46,109.18 LCD2.10@66.73,107.91 ; LCD1.10@59.11,149.55 61.015,149.55 62.285,150.82 65.46,150.82 LCD2.10@66.73,149.55 ; LCD1.10@59.541,24.199 cw(c60.581,23.159) 60.581,24.63 cw(c60.581,26.101) LCD1.10@59.541,25.061 ; LCD1.10@59.541,65.839 cw(c60.581,64.799) 60.581,66.27 cw(c60.581,67.741) LCD1.10@59.541,66.701 ; LCD1.10@59.541,107.479 cw(c60.581,106.439) 60.581,107.91 cw(c60.581,109.381) LCD1.10@59.541,108.341 ; LCD1.10@59.541,149.119 cw(c60.581,148.079) 60.581,149.55 cw(c60.581,151.021) LCD1.10@59.541,149.981 ; LCD2.10@66.12,24.63 ccw(c64.649,24.63) 65.69,25.67 ccw(c66.73,26.711) LCD2.10@66.73,25.239 ; LCD2.10@66.12,66.27 ccw(c64.649,66.27) 65.69,67.31 ccw(c66.73,68.351) LCD2.10@66.73,66.879 ; LCD2.10@66.12,107.91 ccw(c64.649,107.91) 65.69,108.95 ccw(c66.73,109.991) LCD2.10@66.73,108.519 ; LCD2.10@66.12,149.55 ccw(c64.649,149.55) 65.69,150.59 ccw(c66.73,151.631) LCD2.10@66.73,150.159 ; LCD1.10@72.81,24.63 74.715,24.63 75.985,25.9 79.16,25.9 LCD2.10@80.43,24.63 ; LCD1.10@72.81,66.27 74.715,66.27 75.985,67.54 79.16,67.54 LCD2.10@80.43,66.27 ; LCD1.10@72.81,107.91 74.715,107.91 75.985,109.18 79.16,109.18 LCD2.10@80.43,107.91 ; LCD1.10@72.81,149.55 74.715,149.55 75.985,150.82 79.16,150.82 LCD2.10@80.43,149.55 ; LCD1.10@73.241,24.199 cw(c74.281,23.159) 74.281,24.63 cw(c74.281,26.101) LCD1.10@73.241,25.061 ; LCD1.10@73.241,65.839 cw(c74.281,64.799) 74.281,66.27 cw(c74.281,67.741) LCD1.10@73.241,66.701 ; LCD1.10@73.241,107.479 cw(c74.281,106.439) 74.281,107.91 cw(c74.281,109.381) LCD1.10@73.241,108.341 ; LCD1.10@73.241,149.119 cw(c74.281,148.079) 74.281,149.55 cw(c74.281,151.021) LCD1.10@73.241,149.981 ; LCD2.10@79.82,24.63 ccw(c78.349,24.63) 79.39,25.67 ccw(c80.43,26.711) LCD2.10@80.43,25.239 ; LCD2.10@79.82,66.27 ccw(c78.349,66.27) 79.39,67.31 ccw(c80.43,68.351) LCD2.10@80.43,66.879 ; LCD2.10@79.82,107.91 ccw(c78.349,107.91) 79.39,108.95 ccw(c80.43,109.991) LCD2.10@80.43,108.519 ; LCD2.10@79.82,149.55 ccw(c78.349,149.55) 79.39,150.59 ccw(c80.43,151.631) LCD2.10@80.43,150.159 ; LCD1.10@86.51,24.63 88.415,24.63 89.685,25.9 92.86,25.9 LCD2.10@94.13,24.63 ; LCD1.10@86.51,66.27 88.415,66.27 89.685,67.54 92.86,67.54 LCD2.10@94.13,66.27 ; LCD1.10@86.51,107.91 88.415,107.91 89.685,109.18 92.86,109.18 LCD2.10@94.13,107.91 ; LCD1.10@86.51,149.55 88.415,149.55 89.685,150.82 92.86,150.82 LCD2.10@94.13,149.55 ; LCD1.10@86.941,24.199 cw(c87.981,23.159) 87.981,24.63 cw(c87.981,26.101) LCD1.10@86.941,25.061 ; LCD1.10@86.941,65.839 cw(c87.981,64.799) 87.981,66.27 cw(c87.981,67.741) LCD1.10@86.941,66.701 ; LCD1.10@86.941,107.479 cw(c87.981,106.439) 87.981,107.91 cw(c87.981,109.381) LCD1.10@86.941,108.341 ; LCD1.10@86.941,149.119 cw(c87.981,148.079) 87.981,149.55 cw(c87.981,151.021) LCD1.10@86.941,149.981 ; LCD2.10@93.52,24.63 ccw(c92.049,24.63) 93.09,25.67 ccw(c94.13,26.711) LCD2.10@94.13,25.239 ; LCD2.10@93.52,66.27 ccw(c92.049,66.27) 93.09,67.31 ccw(c94.13,68.351) LCD2.10@94.13,66.879 ; LCD2.10@93.52,107.91 ccw(c92.049,107.91) 93.09,108.95 ccw(c94.13,109.991) LCD2.10@94.13,108.519 ; LCD2.10@93.52,149.55 ccw(c92.049,149.55) 93.09,150.59 ccw(c94.13,151.631) LCD2.10@94.13,150.159 ; LCD1.10@100.21,24.63 102.115,24.63 103.385,25.9 106.56,25.9 LCD2.10@107.83,24.63 ; LCD1.10@100.21,66.27 102.115,66.27 103.385,67.54 106.56,67.54 LCD2.10@107.83,66.27 ; LCD1.10@100.21,107.91 102.115,107.91 103.385,109.18 106.56,109.18 LCD2.10@107.83,107.91 ; LCD1.10@100.21,149.55 102.115,149.55 103.385,150.82 106.56,150.82 LCD2.10@107.83,149.55 ; LCD1.10@100.641,24.199 cw(c101.681,23.159) 101.681,24.63 cw(c101.681,26.101) LCD1.10@100.641,25.061 ; LCD1.10@100.641,65.839 cw(c101.681,64.799) 101.681,66.27 cw(c101.681,67.741) LCD1.10@100.641,66.701 ; LCD1.10@100.641,107.479 cw(c101.681,106.439) 101.681,107.91 cw(c101.681,109.381) LCD1.10@100.641,108.341 ; LCD1.10@100.641,149.119 cw(c101.681,148.079) 101.681,149.55 cw(c101.681,151.021) LCD1.10@100.641,149.981 ; LCD2.10@107.22,24.63 ccw(c105.749,24.63) 106.79,25.67 ccw(c107.83,26.711) LCD2.10@107.83,25.239 ; LCD2.10@107.22,66.27 ccw(c105.749,66.27) 106.79,67.31 ccw(c107.83,68.351) LCD2.10@107.83,66.879 ; LCD2.10@107.22,107.91 ccw(c105.749,107.91) 106.79,108.95 ccw(c107.83,109.991) LCD2.10@107.83,108.519 ; LCD2.10@107.22,149.55 ccw(c105.749,149.55) 106.79,150.59 ccw(c107.83,151.631) LCD2.10@107.83,150.159 ; LCD1.10@113.91,24.63 115.815,24.63 117.085,25.9 120.26,25.9 LCD2.10@121.53,24.63 ; LCD1.10@113.91,66.27 115.815,66.27 117.085,67.54 120.26,67.54 LCD2.10@121.53,66.27 ; LCD1.10@113.91,107.91 115.815,107.91 117.085,109.18 120.26,109.18 LCD2.10@121.53,107.91 ; LCD1.10@113.91,149.55 115.815,149.55 117.085,150.82 120.26,150.82 LCD2.10@121.53,149.55 ; LCD1.10@114.341,24.199 cw(c115.381,23.159) 115.381,24.63 cw(c115.381,26.101) LCD1.10@114.341,25.061 ; LCD1.10@114.341,65.839 cw(c115.381,64.799) 115.381,66.27 cw(c115.381,67.741) LCD1.10@114.341,66.701 ; LCD1.10@114.341,107.479 cw(c115.381,106.439) 115.381,107.91 cw(c115.381,109.381) LCD1.10@114.341,108.341 ; LCD1.10@114.341,149.119 cw(c115.381,148.079) 115.381,149.55 cw(c115.381,151.021) LCD1.10@114.341,149.981 ; LCD2.10@120.92,24.63 ccw(c119.449,24.63) 120.49,25.67 ccw(c121.53,26.711) LCD2.10@121.53,25.239 ; LCD2.10@120.92,66.27 ccw(c119.449,66.27) 120.49,67.31 ccw(c121.53,68.351) LCD2.10@121.53,66.879 ; LCD2.10@120.92,107.91 ccw(c119.449,107.91) 120.49,108.95 ccw(c121.53,109.991) LCD2.10@121.53,108.519 ; LCD2.10@120.92,149.55 ccw(c119.449,149.55) 120.49,150.59 ccw(c121.53,151.631) LCD2.10@121.53,150.159 ; LCD1.10@127.61,24.63 129.515,24.63 130.785,25.9 133.96,25.9 LCD2.10@135.23,24.63 ; LCD1.10@127.61,66.27 129.515,66.27 130.785,67.54 133.96,67.54 LCD2.10@135.23,66.27 ; LCD1.10@127.61,107.91 129.515,107.91 130.785,109.18 133.96,109.18 LCD2.10@135.23,107.91 ; LCD1.10@127.61,149.55 129.515,149.55 130.785,150.82 133.96,150.82 LCD2.10@135.23,149.55 ; LCD1.10@128.041,24.199 cw(c129.081,23.159) 129.081,24.63 cw(c129.081,26.101) LCD1.10@128.041,25.061 ; LCD1.10@128.041,65.839 cw(c129.081,64.799) 129.081,66.27 cw(c129.081,67.741) LCD1.10@128.041,66.701 ; LCD1.10@128.041,107.479 cw(c129.081,106.439) 129.081,107.91 cw(c129.081,109.381) LCD1.10@128.041,108.341 ; LCD1.10@128.041,149.119 cw(c129.081,148.079) 129.081,149.55 cw(c129.081,151.021) LCD1.10@128.041,149.981 ; LCD2.10@134.62,24.63 ccw(c133.149,24.63) 134.19,25.67 ccw(c135.23,26.711) LCD2.10@135.23,25.239 ; LCD2.10@134.62,66.27 ccw(c133.149,66.27) 134.19,67.31 ccw(c135.23,68.351) LCD2.10@135.23,66.879 ; LCD2.10@134.62,107.91 ccw(c133.149,107.91) 134.19,108.95 ccw(c135.23,109.991) LCD2.10@135.23,108.519 ; LCD2.10@134.62,149.55 ccw(c133.149,149.55) 134.19,150.59 ccw(c135.23,151.631) LCD2.10@135.23,150.159
NetLCD1_11: LCD1.11 LCD2.11 | length 531.8
  Top Layer w0.381: LCD1.11@4.31,27.17 6.215,27.17 7.485,28.44 10.66,28.44 LCD2.11@11.93,27.17 ; LCD1.11@4.31,68.81 6.215,68.81 7.485,70.08 10.66,70.08 LCD2.11@11.93,68.81 ; LCD1.11@4.31,110.45 6.215,110.45 7.485,111.72 10.66,111.72 LCD2.11@11.93,110.45 ; LCD1.11@4.31,152.09 6.215,152.09 7.485,153.36 10.66,153.36 LCD2.11@11.93,152.09 ; LCD1.11@4.741,26.739 cw(c5.781,25.699) 5.781,27.17 cw(c5.781,28.641) LCD1.11@4.741,27.601 ; LCD1.11@4.741,68.379 cw(c5.781,67.339) 5.781,68.81 cw(c5.781,70.281) LCD1.11@4.741,69.241 ; LCD1.11@4.741,110.019 cw(c5.781,108.979) 5.781,110.45 cw(c5.781,111.921) LCD1.11@4.741,110.881 ; LCD1.11@4.741,151.659 cw(c5.781,150.619) 5.781,152.09 cw(c5.781,153.561) LCD1.11@4.741,152.521 ; LCD2.11@11.321,27.17 ccw(c9.849,27.17) 10.89,28.21 ccw(c11.93,29.251) LCD2.11@11.93,27.779 ; LCD2.11@11.321,68.81 ccw(c9.849,68.81) 10.89,69.85 ccw(c11.93,70.891) LCD2.11@11.93,69.419 ; LCD2.11@11.321,110.45 ccw(c9.849,110.45) 10.89,111.49 ccw(c11.93,112.531) LCD2.11@11.93,111.059 ; LCD2.11@11.321,152.09 ccw(c9.849,152.09) 10.89,153.13 ccw(c11.93,154.171) LCD2.11@11.93,152.699 ; LCD1.11@18.01,27.17 19.915,27.17 21.185,28.44 24.36,28.44 LCD2.11@25.63,27.17 ; LCD1.11@18.01,68.81 19.915,68.81 21.185,70.08 24.36,70.08 LCD2.11@25.63,68.81 ; LCD1.11@18.01,110.45 19.915,110.45 21.185,111.72 24.36,111.72 LCD2.11@25.63,110.45 ; LCD1.11@18.01,152.09 19.915,152.09 21.185,153.36 24.36,153.36 LCD2.11@25.63,152.09 ; LCD1.11@18.441,26.739 cw(c19.481,25.699) 19.481,27.17 cw(c19.481,28.641) LCD1.11@18.441,27.601 ; LCD1.11@18.441,68.379 cw(c19.481,67.339) 19.481,68.81 cw(c19.481,70.281) LCD1.11@18.441,69.241 ; LCD1.11@18.441,110.019 cw(c19.481,108.979) 19.481,110.45 cw(c19.481,111.921) LCD1.11@18.441,110.881 ; LCD1.11@18.441,151.659 cw(c19.481,150.619) 19.481,152.09 cw(c19.481,153.561) LCD1.11@18.441,152.521 ; LCD2.11@25.02,27.17 ccw(c23.549,27.17) 24.59,28.21 ccw(c25.63,29.251) LCD2.11@25.63,27.779 ; LCD2.11@25.02,68.81 ccw(c23.549,68.81) 24.59,69.85 ccw(c25.63,70.891) LCD2.11@25.63,69.419 ; LCD2.11@25.02,110.45 ccw(c23.549,110.45) 24.59,111.49 ccw(c25.63,112.531) LCD2.11@25.63,111.059 ; LCD2.11@25.02,152.09 ccw(c23.549,152.09) 24.59,153.13 ccw(c25.63,154.171) LCD2.11@25.63,152.699 ; LCD1.11@31.71,27.17 33.615,27.17 34.885,28.44 38.06,28.44 LCD2.11@39.33,27.17 ; LCD1.11@31.71,68.81 33.615,68.81 34.885,70.08 38.06,70.08 LCD2.11@39.33,68.81 ; LCD1.11@31.71,110.45 33.615,110.45 34.885,111.72 38.06,111.72 LCD2.11@39.33,110.45 ; LCD1.11@31.71,152.09 33.615,152.09 34.885,153.36 38.06,153.36 LCD2.11@39.33,152.09 ; LCD1.11@32.141,26.739 cw(c33.181,25.699) 33.181,27.17 cw(c33.181,28.641) LCD1.11@32.141,27.601 ; LCD1.11@32.141,68.379 cw(c33.181,67.339) 33.181,68.81 cw(c33.181,70.281) LCD1.11@32.141,69.241 ; LCD1.11@32.141,110.019 cw(c33.181,108.979) 33.181,110.45 cw(c33.181,111.921) LCD1.11@32.141,110.881 ; LCD1.11@32.141,151.659 cw(c33.181,150.619) 33.181,152.09 cw(c33.181,153.561) LCD1.11@32.141,152.521 ; LCD2.11@38.72,27.17 ccw(c37.249,27.17) 38.29,28.21 ccw(c39.33,29.251) LCD2.11@39.33,27.779 ; LCD2.11@38.72,68.81 ccw(c37.249,68.81) 38.29,69.85 ccw(c39.33,70.891) LCD2.11@39.33,69.419 ; LCD2.11@38.72,110.45 ccw(c37.249,110.45) 38.29,111.49 ccw(c39.33,112.531) LCD2.11@39.33,111.059 ; LCD2.11@38.72,152.09 ccw(c37.249,152.09) 38.29,153.13 ccw(c39.33,154.171) LCD2.11@39.33,152.699 ; LCD1.11@45.41,27.17 47.315,27.17 48.585,28.44 51.76,28.44 LCD2.11@53.03,27.17 ; LCD1.11@45.41,68.81 47.315,68.81 48.585,70.08 51.76,70.08 LCD2.11@53.03,68.81 ; LCD1.11@45.41,110.45 47.315,110.45 48.585,111.72 51.76,111.72 LCD2.11@53.03,110.45 ; LCD1.11@45.41,152.09 47.315,152.09 48.585,153.36 51.76,153.36 LCD2.11@53.03,152.09 ; LCD1.11@45.841,26.739 cw(c46.881,25.699) 46.881,27.17 cw(c46.881,28.641) LCD1.11@45.841,27.601 ; LCD1.11@45.841,68.379 cw(c46.881,67.339) 46.881,68.81 cw(c46.881,70.281) LCD1.11@45.841,69.241 ; LCD1.11@45.841,110.019 cw(c46.881,108.979) 46.881,110.45 cw(c46.881,111.921) LCD1.11@45.841,110.881 ; LCD1.11@45.841,151.659 cw(c46.881,150.619) 46.881,152.09 cw(c46.881,153.561) LCD1.11@45.841,152.521 ; LCD2.11@52.42,27.17 ccw(c50.949,27.17) 51.99,28.21 ccw(c53.03,29.251) LCD2.11@53.03,27.779 ; LCD2.11@52.42,68.81 ccw(c50.949,68.81) 51.99,69.85 ccw(c53.03,70.891) LCD2.11@53.03,69.419 ; LCD2.11@52.42,110.45 ccw(c50.949,110.45) 51.99,111.49 ccw(c53.03,112.531) LCD2.11@53.03,111.059 ; LCD2.11@52.42,152.09 ccw(c50.949,152.09) 51.99,153.13 ccw(c53.03,154.171) LCD2.11@53.03,152.699 ; LCD1.11@59.11,27.17 61.015,27.17 62.285,28.44 65.46,28.44 LCD2.11@66.73,27.17 ; LCD1.11@59.11,68.81 61.015,68.81 62.285,70.08 65.46,70.08 LCD2.11@66.73,68.81 ; LCD1.11@59.11,110.45 61.015,110.45 62.285,111.72 65.46,111.72 LCD2.11@66.73,110.45 ; LCD1.11@59.11,152.09 61.015,152.09 62.285,153.36 65.46,153.36 LCD2.11@66.73,152.09 ; LCD1.11@59.541,26.739 cw(c60.581,25.699) 60.581,27.17 cw(c60.581,28.641) LCD1.11@59.541,27.601 ; LCD1.11@59.541,68.379 cw(c60.581,67.339) 60.581,68.81 cw(c60.581,70.281) LCD1.11@59.541,69.241 ; LCD1.11@59.541,110.019 cw(c60.581,108.979) 60.581,110.45 cw(c60.581,111.921) LCD1.11@59.541,110.881 ; LCD1.11@59.541,151.659 cw(c60.581,150.619) 60.581,152.09 cw(c60.581,153.561) LCD1.11@59.541,152.521 ; LCD2.11@66.12,27.17 ccw(c64.649,27.17) 65.69,28.21 ccw(c66.73,29.251) LCD2.11@66.73,27.779 ; LCD2.11@66.12,68.81 ccw(c64.649,68.81) 65.69,69.85 ccw(c66.73,70.891) LCD2.11@66.73,69.419 ; LCD2.11@66.12,110.45 ccw(c64.649,110.45) 65.69,111.49 ccw(c66.73,112.531) LCD2.11@66.73,111.059 ; LCD2.11@66.12,152.09 ccw(c64.649,152.09) 65.69,153.13 ccw(c66.73,154.171) LCD2.11@66.73,152.699 ; LCD1.11@72.81,27.17 74.715,27.17 75.985,28.44 79.16,28.44 LCD2.11@80.43,27.17 ; LCD1.11@72.81,68.81 74.715,68.81 75.985,70.08 79.16,70.08 LCD2.11@80.43,68.81 ; LCD1.11@72.81,110.45 74.715,110.45 75.985,111.72 79.16,111.72 LCD2.11@80.43,110.45 ; LCD1.11@72.81,152.09 74.715,152.09 75.985,153.36 79.16,153.36 LCD2.11@80.43,152.09 ; LCD1.11@73.241,26.739 cw(c74.281,25.699) 74.281,27.17 cw(c74.281,28.641) LCD1.11@73.241,27.601 ; LCD1.11@73.241,68.379 cw(c74.281,67.339) 74.281,68.81 cw(c74.281,70.281) LCD1.11@73.241,69.241 ; LCD1.11@73.241,110.019 cw(c74.281,108.979) 74.281,110.45 cw(c74.281,111.921) LCD1.11@73.241,110.881 ; LCD1.11@73.241,151.659 cw(c74.281,150.619) 74.281,152.09 cw(c74.281,153.561) LCD1.11@73.241,152.521 ; LCD2.11@79.82,27.17 ccw(c78.349,27.17) 79.39,28.21 ccw(c80.43,29.251) LCD2.11@80.43,27.779 ; LCD2.11@79.82,68.81 ccw(c78.349,68.81) 79.39,69.85 ccw(c80.43,70.891) LCD2.11@80.43,69.419 ; LCD2.11@79.82,110.45 ccw(c78.349,110.45) 79.39,111.49 ccw(c80.43,112.531) LCD2.11@80.43,111.059 ; LCD2.11@79.82,152.09 ccw(c78.349,152.09) 79.39,153.13 ccw(c80.43,154.171) LCD2.11@80.43,152.699 ; LCD1.11@86.51,27.17 88.415,27.17 89.685,28.44 92.86,28.44 LCD2.11@94.13,27.17 ; LCD1.11@86.51,68.81 88.415,68.81 89.685,70.08 92.86,70.08 LCD2.11@94.13,68.81 ; LCD1.11@86.51,110.45 88.415,110.45 89.685,111.72 92.86,111.72 LCD2.11@94.13,110.45 ; LCD1.11@86.51,152.09 88.415,152.09 89.685,153.36 92.86,153.36 LCD2.11@94.13,152.09 ; LCD1.11@86.941,26.739 cw(c87.981,25.699) 87.981,27.17 cw(c87.981,28.641) LCD1.11@86.941,27.601 ; LCD1.11@86.941,68.379 cw(c87.981,67.339) 87.981,68.81 cw(c87.981,70.281) LCD1.11@86.941,69.241 ; LCD1.11@86.941,110.019 cw(c87.981,108.979) 87.981,110.45 cw(c87.981,111.921) LCD1.11@86.941,110.881 ; LCD1.11@86.941,151.659 cw(c87.981,150.619) 87.981,152.09 cw(c87.981,153.561) LCD1.11@86.941,152.521 ; LCD2.11@93.52,27.17 ccw(c92.049,27.17) 93.09,28.21 ccw(c94.13,29.251) LCD2.11@94.13,27.779 ; LCD2.11@93.52,68.81 ccw(c92.049,68.81) 93.09,69.85 ccw(c94.13,70.891) LCD2.11@94.13,69.419 ; LCD2.11@93.52,110.45 ccw(c92.049,110.45) 93.09,111.49 ccw(c94.13,112.531) LCD2.11@94.13,111.059 ; LCD2.11@93.52,152.09 ccw(c92.049,152.09) 93.09,153.13 ccw(c94.13,154.171) LCD2.11@94.13,152.699 ; LCD1.11@100.21,27.17 102.115,27.17 103.385,28.44 106.56,28.44 LCD2.11@107.83,27.17 ; LCD1.11@100.21,68.81 102.115,68.81 103.385,70.08 106.56,70.08 LCD2.11@107.83,68.81 ; LCD1.11@100.21,110.45 102.115,110.45 103.385,111.72 106.56,111.72 LCD2.11@107.83,110.45 ; LCD1.11@100.21,152.09 102.115,152.09 103.385,153.36 106.56,153.36 LCD2.11@107.83,152.09 ; LCD1.11@100.641,26.739 cw(c101.681,25.699) 101.681,27.17 cw(c101.681,28.641) LCD1.11@100.641,27.601 ; LCD1.11@100.641,68.379 cw(c101.681,67.339) 101.681,68.81 cw(c101.681,70.281) LCD1.11@100.641,69.241 ; LCD1.11@100.641,110.019 cw(c101.681,108.979) 101.681,110.45 cw(c101.681,111.921) LCD1.11@100.641,110.881 ; LCD1.11@100.641,151.659 cw(c101.681,150.619) 101.681,152.09 cw(c101.681,153.561) LCD1.11@100.641,152.521 ; LCD2.11@107.22,27.17 ccw(c105.749,27.17) 106.79,28.21 ccw(c107.83,29.251) LCD2.11@107.83,27.779 ; LCD2.11@107.22,68.81 ccw(c105.749,68.81) 106.79,69.85 ccw(c107.83,70.891) LCD2.11@107.83,69.419 ; LCD2.11@107.22,110.45 ccw(c105.749,110.45) 106.79,111.49 ccw(c107.83,112.531) LCD2.11@107.83,111.059 ; LCD2.11@107.22,152.09 ccw(c105.749,152.09) 106.79,153.13 ccw(c107.83,154.171) LCD2.11@107.83,152.699 ; LCD1.11@113.91,27.17 115.815,27.17 117.085,28.44 120.26,28.44 LCD2.11@121.53,27.17 ; LCD1.11@113.91,68.81 115.815,68.81 117.085,70.08 120.26,70.08 LCD2.11@121.53,68.81 ; LCD1.11@113.91,110.45 115.815,110.45 117.085,111.72 120.26,111.72 LCD2.11@121.53,110.45 ; LCD1.11@113.91,152.09 115.815,152.09 117.085,153.36 120.26,153.36 LCD2.11@121.53,152.09 ; LCD1.11@114.341,26.739 cw(c115.381,25.699) 115.381,27.17 cw(c115.381,28.641) LCD1.11@114.341,27.601 ; LCD1.11@114.341,68.379 cw(c115.381,67.339) 115.381,68.81 cw(c115.381,70.281) LCD1.11@114.341,69.241 ; LCD1.11@114.341,110.019 cw(c115.381,108.979) 115.381,110.45 cw(c115.381,111.921) LCD1.11@114.341,110.881 ; LCD1.11@114.341,151.659 cw(c115.381,150.619) 115.381,152.09 cw(c115.381,153.561) LCD1.11@114.341,152.521 ; LCD2.11@120.92,27.17 ccw(c119.449,27.17) 120.49,28.21 ccw(c121.53,29.251) LCD2.11@121.53,27.779 ; LCD2.11@120.92,68.81 ccw(c119.449,68.81) 120.49,69.85 ccw(c121.53,70.891) LCD2.11@121.53,69.419 ; LCD2.11@120.92,110.45 ccw(c119.449,110.45) 120.49,111.49 ccw(c121.53,112.531) LCD2.11@121.53,111.059 ; LCD2.11@120.92,152.09 ccw(c119.449,152.09) 120.49,153.13 ccw(c121.53,154.171) LCD2.11@121.53,152.699 ; LCD1.11@127.61,27.17 129.515,27.17 130.785,28.44 133.96,28.44 LCD2.11@135.23,27.17 ; LCD1.11@127.61,68.81 129.515,68.81 130.785,70.08 133.96,70.08 LCD2.11@135.23,68.81 ; LCD1.11@127.61,110.45 129.515,110.45 130.785,111.72 133.96,111.72 LCD2.11@135.23,110.45 ; LCD1.11@127.61,152.09 129.515,152.09 130.785,153.36 133.96,153.36 LCD2.11@135.23,152.09 ; LCD1.11@128.041,26.739 cw(c129.081,25.699) 129.081,27.17 cw(c129.081,28.641) LCD1.11@128.041,27.601 ; LCD1.11@128.041,68.379 cw(c129.081,67.339) 129.081,68.81 cw(c129.081,70.281) LCD1.11@128.041,69.241 ; LCD1.11@128.041,110.019 cw(c129.081,108.979) 129.081,110.45 cw(c129.081,111.921) LCD1.11@128.041,110.881 ; LCD1.11@128.041,151.659 cw(c129.081,150.619) 129.081,152.09 cw(c129.081,153.561) LCD1.11@128.041,152.521 ; LCD2.11@134.62,27.17 ccw(c133.149,27.17) 134.19,28.21 ccw(c135.23,29.251) LCD2.11@135.23,27.779 ; LCD2.11@134.62,68.81 ccw(c133.149,68.81) 134.19,69.85 ccw(c135.23,70.891) LCD2.11@135.23,69.419 ; LCD2.11@134.62,110.45 ccw(c133.149,110.45) 134.19,111.49 ccw(c135.23,112.531) LCD2.11@135.23,111.059 ; LCD2.11@134.62,152.09 ccw(c133.149,152.09) 134.19,153.13 ccw(c135.23,154.171) LCD2.11@135.23,152.699